# EAGLE board Gleisbesetzmeldung2 (EAGLE 8.1.0)
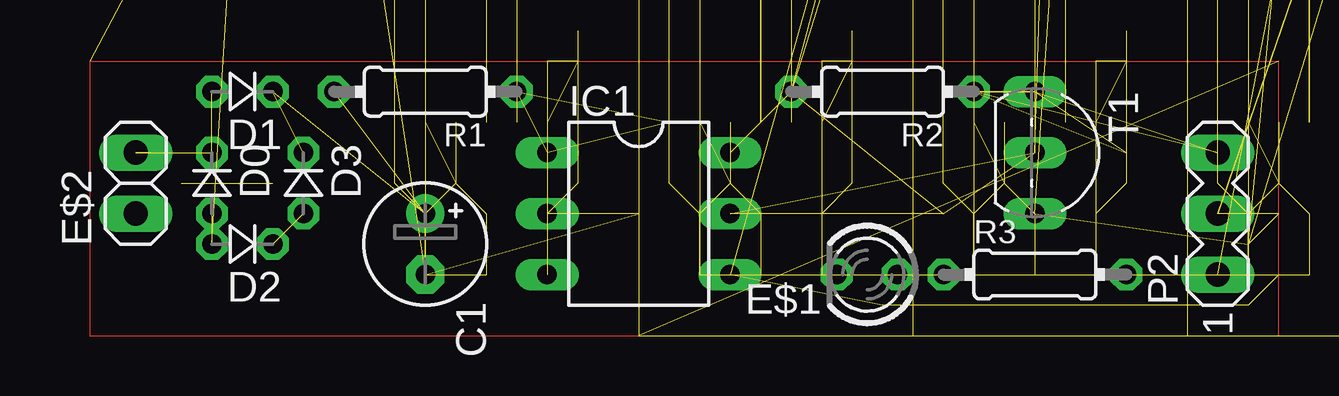
[diagram p0: board, top side]
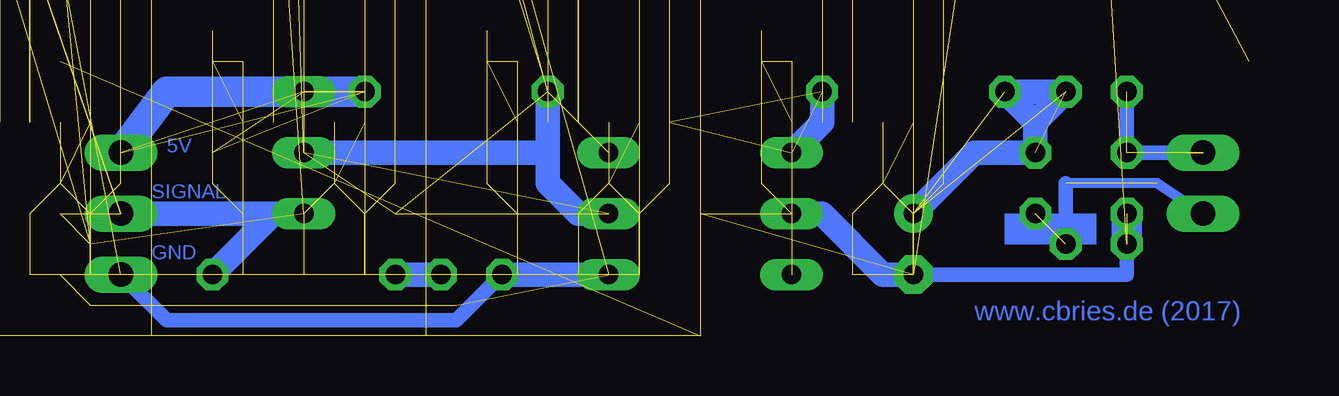
[diagram p1: board, bottom side, seen from below]

No outline drawn. Coordinates in mm, seen from the top.
Copper layers (1*16): Top 0.035mm / dielectric 1.5mm / Bottom 0.035mm
Design rules "default": minimum track width 10mil, minimum drill 24mil, track to track 8mil, track to pad 8mil, pad to pad 8mil, via to via 8mil, smd to smd 8mil, copper to edge 40mil, drill to drill 8mil, minimum pad ring 10mil, minimum via ring 8mil, stop-mask expansion 4mil, vias tented up to drill 0mil, thermal gap 10mil

## Footprints (pad centres in the part's own frame; a part is rotated, then mirrored left to right if it is on the bottom)
E2,5-5 = drill 0.813 pad 1.6: + -1.27,0 | drill 0.813 pad 1.6 octagon: - 1.27,0
D-2.5 = drill 0.813 octagon: A 1.27,0; C -1.27,0
LED3MM = drill 0.813 octagon: A -1.27,0; K 1.27,0
1X02 = drill 1.016 long: 1 -1.27,0; 2 1.27,0
DIL06 = drill 0.813 long: 1 -2.54,-3.81; 2 0,-3.81; 3 2.54,-3.81; 4 2.54,3.81; 5 0,3.81; 6 -2.54,3.81
MA03-1 = drill 1.016 long: 1 -2.54,0; 2 0,0; 3 2.54,0
0204/7 = drill 0.813 octagon: 1 -3.81,0; 2 3.81,0
TO92-CBE = drill 0.813 long: B 0,0; C -2.54,0; E 2.54,0

## Placement (x,y rotation side)
C1  22uF, 35V  [E2,5-5]  13.97,3.81 270 top
D0  [D-2.5]  5.08,6.35 270 top
D1  [D-2.5]  6.35,10.16 180 top
D2  [D-2.5]  6.35,3.81 180 top
D3  [D-2.5]  8.89,6.35 270 top
E$1  [LED3MM]  32.38,2.54 180 top
E$2  [1X02]  1.91,6.35 90 top
IC1  CNY-17-2  [DIL06]  22.86,5.08 270 top
P2  [MA03-1]  46.99,5.08 90 top
R1  1k  [0204/7]  13.97,10.16 180 top
R2  1k  [0204/7]  33.02,10.16 180 top
R3  220  [0204/7]  39.37,2.54 0 top
T1  [TO92-CBE]  39.37,7.62 270 top

## Library data of the parts
C1 R1-R3 = rcl
D0 D1-D3 = diode
E$1 = led
E$2 = pinhead
IC1 = ic-package
P2 = con-lstb
T1 = transistor-neu-to92

## Nets
S$2: D0.C D1.A
S$3: P2.3 R2.1 T1.C
S$4: IC1.5 IC1.6 R2.2 T1.B
S$5: E$1.A R3.1
S$6: C1.- D0.A D2.A IC1.2
S$7: C1.+ D1.C D3.C R1.2
S$8: IC1.1 R1.1
S$11: E$1.K IC1.4 P2.1 P2.2 R3.2 T1.E
S$122: D2.C D3.A

## Tracks (layer width: path | path; a pad name or v marks a point on that pad's centre or on a via)
S$1  (21 unrouted)
  Top 0: 49.53,0 49.53,11.43 0,11.43 0,0 49.53,0
S$2  (5 unrouted)
  Bottom 0.61: D1.A D0.C 1.91,7.62
S$3  (6 unrouted)
  Bottom 1.27: R2.1 T1.C 45.09,10.16 P2.3
S$4  (10 unrouted)
  Bottom 1.016: R2.2 29.21,7.62 | 29.21,7.62 29.21,6.35 27.94,5.08 IC1.5 | T1.B 29.21,7.62
S$5
  Bottom 1.016: E$1.A R3.1
S$6  (5 unrouted)
  Bottom 0.61: D2.A 5.08,2.54 C1.-
  Bottom 1.016: C1.- 15.24,2.54 17.78,5.08 IC1.2
  Bottom 1.27: D0.A D2.A
S$7  (3 unrouted)
  Bottom 1.016: 8.89,8.89 R1.2 D1.C 8.89,8.89 | 8.89,8.89 D3.C 11.43,7.62 C1.+
S$8  (4 unrouted)
  Bottom 1.016: R1.1 17.78,8.89 IC1.1
S$9  (4 unrouted)
S$10  (3 unrouted)
S$11  (22 unrouted)
  Bottom 0.61: E$1.K 33.02,0.64 45.09,0.64 P2.1
  Bottom 1.016: IC1.4 E$1.K | R3.2 40.64,5.08 T1.E P2.2
S$12  (6 unrouted)
S$13  (3 unrouted)
S$14  (2 unrouted)
S$15  (4 unrouted)
S$16  (3 unrouted)
S$17  (5 unrouted)
S$18  (4 unrouted)
S$19  (3 unrouted)
S$20  (6 unrouted)
S$21  (3 unrouted)
S$22  (2 unrouted)
S$23  (4 unrouted)
S$24  (3 unrouted)
S$25  (5 unrouted)
S$26  (4 unrouted)
S$27  (3 unrouted)
S$28  (6 unrouted)
S$29  (3 unrouted)
S$30  (2 unrouted)
S$31  (4 unrouted)
S$32  (3 unrouted)
S$33  (5 unrouted)
S$34  (4 unrouted)
S$35  (3 unrouted)
S$36  (6 unrouted)
S$37  (3 unrouted)
S$38  (2 unrouted)
S$39  (4 unrouted)
S$40  (3 unrouted)
S$41  (5 unrouted)
S$42  (4 unrouted)
S$43  (3 unrouted)
S$44  (6 unrouted)
S$45  (3 unrouted)
S$46  (2 unrouted)
S$47  (4 unrouted)
S$48  (3 unrouted)
S$49  (5 unrouted)
S$50  (4 unrouted)
S$51  (3 unrouted)
S$52  (6 unrouted)
S$53  (3 unrouted)
S$54  (2 unrouted)
S$55  (4 unrouted)
S$56  (3 unrouted)
S$57  (5 unrouted)
S$58  (4 unrouted)
S$59  (3 unrouted)
S$60  (6 unrouted)
S$61  (3 unrouted)
S$62  (2 unrouted)
S$63  (4 unrouted)
S$64  (3 unrouted)
S$65  (5 unrouted)
S$66  (4 unrouted)
S$67  (3 unrouted)
S$68  (6 unrouted)
S$69  (3 unrouted)
S$70  (3 unrouted)
S$71  (4 unrouted)
S$72  (4 unrouted)
S$73  (8 unrouted)
S$74  (4 unrouted)
S$75  (3 unrouted)
S$76  (6 unrouted)
S$77  (3 unrouted)
S$78  (3 unrouted)
S$79  (4 unrouted)
S$80  (4 unrouted)
S$81  (8 unrouted)
S$82  (4 unrouted)
S$83  (3 unrouted)
S$84  (6 unrouted)
S$85  (3 unrouted)
S$86  (3 unrouted)
S$87  (4 unrouted)
S$88  (4 unrouted)
S$89  (8 unrouted)
S$90  (4 unrouted)
S$91  (3 unrouted)
S$92  (6 unrouted)
S$93  (3 unrouted)
S$94  (3 unrouted)
S$95  (4 unrouted)
S$96  (4 unrouted)
S$97  (8 unrouted)
S$98  (4 unrouted)
S$99  (3 unrouted)
S$100  (6 unrouted)
S$101  (3 unrouted)
S$102  (3 unrouted)
S$103  (4 unrouted)
S$104  (4 unrouted)
S$105  (8 unrouted)
S$106  (4 unrouted)
S$107  (3 unrouted)
S$108  (6 unrouted)
S$109  (3 unrouted)
S$110  (3 unrouted)
S$111  (4 unrouted)
S$112  (5 unrouted)
S$113  (8 unrouted)
S$114  (4 unrouted)
S$115  (3 unrouted)
S$116  (6 unrouted)
S$117  (3 unrouted)
S$118  (3 unrouted)
S$119  (4 unrouted)
S$120  (4 unrouted)
S$121  (8 unrouted)
S$122  (2 unrouted)
  Bottom 0.406: 1.91,5.08 3.81,6.35 7.62,6.35
  Bottom 0.61: D3.A D2.C 7.62,6.35
(copper drawn outside any net)
  shapes: Bottom area x1

## Text on the board
Bottom: 5V | SIGNAL | GND | www.cbries.de (2017)